# Altium PCB RF_load_2512.PcbDoc
Units mm, origin at the board's own origin, x right, y up, seen from the top; angles counter-clockwise.
Board outline 59.2 x 20 mm, 2 copper layers (Top Layer, Bottom Layer); 25 components, 3 nets, 56 pads, 1 vias.
Unrouted connection lines stored in the file: 1.
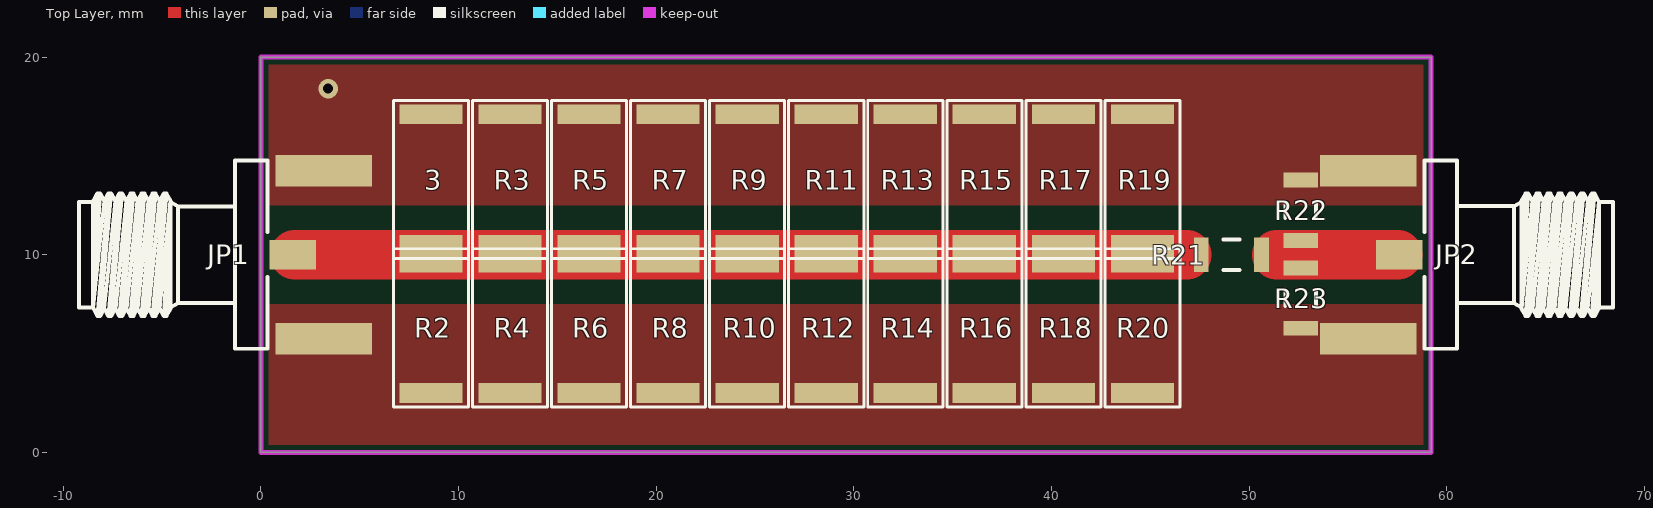
[diagram p0: Top Layer view]
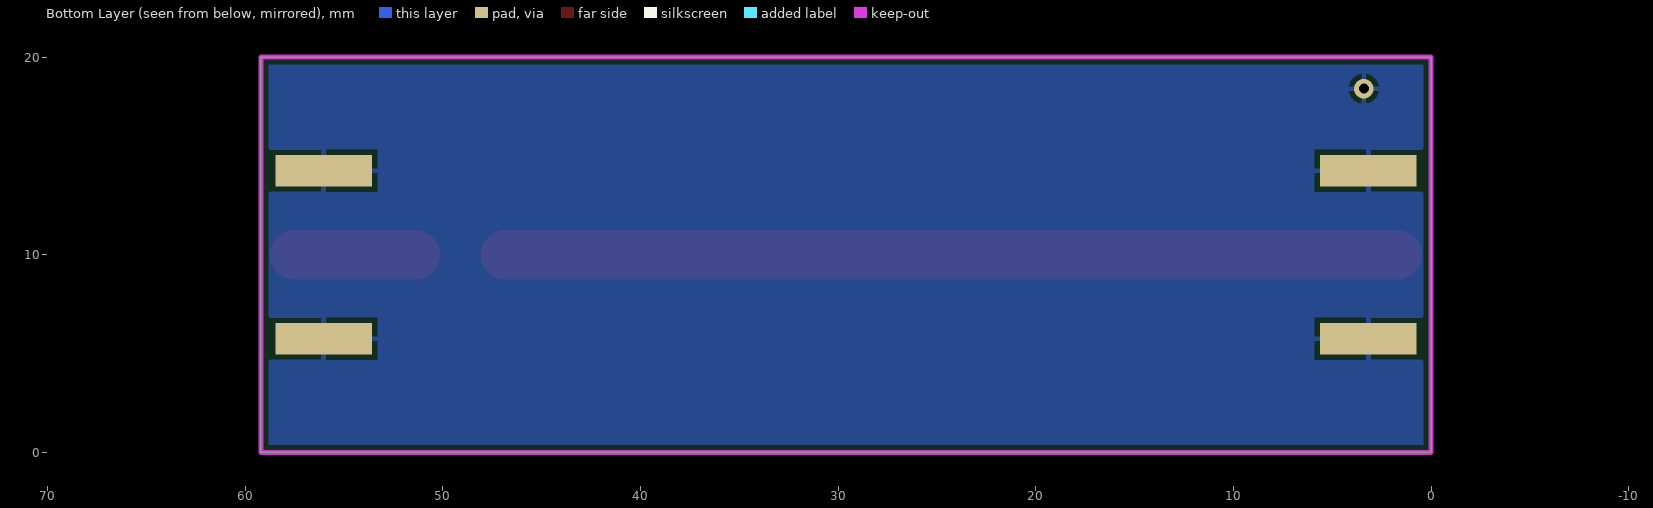
[diagram p1: Bottom Layer view, seen from below]
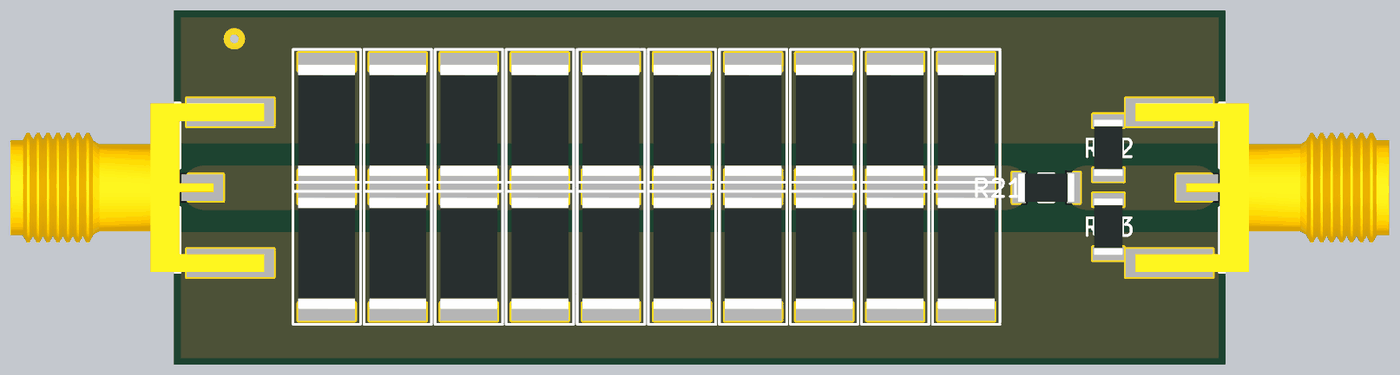
[diagram p2: 3D render of the assembled board from above, using the file's embedded part models]

## Layer stack, top to bottom
Top Solder: solder mask 0.0102, Solder Resist, Dk 3.5
Top Layer: signal copper 0.0356
Dielectric 1: dielectric 0.32, FR-4, Dk 4.8
Bottom Layer: signal copper 0.0356
Bottom Solder: solder mask 0.0102, Solder Resist, Dk 3.5

## Board outline
0,0 59.2,0 59.2,20 0,20

## Design rules (kind name [scope] priority, off if disabled: settings)
Clearance Clearance_2 [InNamedPolygon('GND_L01_P000') Or InNamedPolygon('GND_L01_P001') vs InNet('NetJP2_1')] p1: gap=1.25 ignorepadtopadclearanceinfootprint=FALSE
Clearance Clearance_1 [InNamedPolygon('GND_L01_P000') Or InNamedPolygon('GND_L01_P001') vs InNet('NetJP1_1')] p2: gap=1.25 ignorepadtopadclearanceinfootprint=FALSE
Clearance [All] p3: gap=0.254 ignorepadtopadclearanceinfootprint=FALSE except(0: Arc-Hole Track-Hole SMDPad-Hole THPad-Hole Via-Hole Fill-Hole Poly-Hole Region-Hole Text-Hole)
PolygonConnect PolygonConnect_1 [All vs IsNamedPolygon('GND_L01_P000') Or IsNamedPolygon('GND_L01_P001')] p1: connectstyle=Direct reliefconductorwidth=0.254 reliefentries=4 polygonreliefangle="90 Angle" airgapwidth=0.254
PolygonConnect [All] p2: connectstyle=Relief reliefconductorwidth=0.254 reliefentries=4 polygonreliefangle="90 Angle" airgapwidth=0.254
RoutingVias [All] p1: holewidth=0.711 width=1.27 viastyle="Through Hole" minholewidth=0.711 minwidth=1.27 maxholewidth=0.711 maxwidth=1.27
SolderMaskExpansion [All] p1: expansion=0.102 istentingtop=FALSE
Width [All] p1: maxlimit=5 minlimit=0.25 preferedwidth=2.5
30 further rules are at their usual default settings.

## Components (designator, comment, footprint, x,y, rotation, side; value= is the part's Value field where it differs from the comment)
3 "1k" R-2512_narrow 8.6,11 r90 top (schematic designator R1)
JP1 "RF connector" AMPHENOL_132357-11 1.6,10 r0 top
JP2 "RF connector" AMPHENOL_132357-11 57.6,10 r180 top
R2 "1k" R-2512_narrow 8.6,3.5 r90 top
R3 "1k" R-2512_narrow 12.6,11 r90 top
R4 "1k" R-2512_narrow 12.6,3.5 r90 top
R5 "1k" R-2512_narrow 16.6,11 r90 top
R6 "1k" R-2512_narrow 16.6,3.5 r90 top
R7 "1k" R-2512_narrow 20.6,11 r90 top
R8 "1k" R-2512_narrow 20.6,3.5 r90 top
R9 "1k" R-2512_narrow 24.6,11 r90 top
R10 "1k" R-2512_narrow 24.6,3.5 r90 top
R11 "1k" R-2512_narrow 28.6,11 r90 top
R12 "1k" R-2512_narrow 28.6,3.5 r90 top
R13 "1k" R-2512_narrow 32.6,11 r90 top
R14 "1k" R-2512_narrow 32.6,3.5 r90 top
R15 "1k" R-2512_narrow 36.6,11 r90 top
R16 "1k" R-2512_narrow 36.6,3.5 r90 top
R17 "1k" R-2512_narrow 40.6,11 r90 top
R18 "1k" R-2512_narrow 40.6,3.5 r90 top
R19 "1k" R-2512_narrow 44.6,11 r90 top
R20 "1k" R-2512_narrow 44.6,3.5 r90 top
R21 "750" "R-1206 _narrow" 49.1,10 r180 top
R22 "100" "R-1206 _narrow" 52.6,12.25 r90 top
R23 "100" "R-1206 _narrow" 52.6,7.8 r90 top

## Footprints (in the part's own frame and the unit in brackets; to place one, negate y for a bottom-side part, rotate by r counter-clockwise, add the part's x,y. Pads: shape width x height; smd on the part's side, far side on the other; paste and mask are expansions set on the pad)
AMPHENOL_132357-11 [mm] "SMA End Launch Jack for 1.58mm PCB, 50 Ohm, Flat Tab Contact"
  rect 2.35x1.5 smd: 1(0,0)
  rect 4.9x1.6 smd: 2(1.575,-4.25) 2(1.575,4.25)
  rect 4.9x1.6 smd far side: 2(1.575,-4.25) 2(1.575,4.25)
  silkscreen extent -10.81,-4.76 -1.28,4.76, body extent -10.8,-4.76 3.48,4.76, height 4.08
"R-1206 _narrow" [mm] "Chip Resistor, 2-Leads, Body 3,20x1,60mm, IPC Medium Density"
  rect 0.75x1.75 smd: 1(-1.525,0) 2(1.525,0)
  silkscreen extent -0.4,-0.77 0.4,0.77, body extent -1.6,-0.8 1.6,0.8, height 0.55
R-2512_narrow [mm]
  rect 1x3.2 smd: 1(-0.5,0) 2(6.1,0)
  silkscreen extent -1.2,-1.9 6.8,1.9, body extent -0.35,-1.6 5.95,1.6, height 0.6

## Part data
3 R2 R3 R4 R5 R6 R7 R8 R9 R10 R11 R12 R13 R14 R15 R16 R17 R18 R19 R20 R21 R22 R23: library part RES, Вид=Резистор, Точність/група=5%
JP1 JP2: "RF Connector", Вид=Роз'єм

## Via types
v1: diameter 1, hole 0.5, Top Layer to Bottom Layer, 1 vias

## Nets (pads, with @x,y where several pads share a name; then routed paths per layer and width w, separated by ;. In a path a pad name is that pad's centre, name@x,y a point inside that pad or via, vN(x,y) a via of type N, cw(c..) or ccw(c..) an arc to the next point about the centre after c; other vN are vias at no path point)
GND: 3.2 JP1.2 JP2.2 R2.1 R3.2 R4.1 R5.2 R6.1 R7.2 R8.1 R9.2 R10.1 R11.2 R12.1 R13.2 R14.1 R15.2 R16.1 R17.2 R18.1 R19.2 R20.1 R22.2 R23.1
  other v1: 3.4,18.4
NetJP1_1: 3.1 JP1.1 R2.2 R3.1 R4.2 R5.1 R6.2 R7.1 R8.2 R9.1 R10.2 R11.1 R12.2 R13.1 R14.2 R15.1 R16.2 R17.1 R18.2 R19.1 R20.2 R21.2 | length 45.2
  Top Layer w2.5: JP1.1@1.7,10 8.6,10 10.85,10 19.85,10 24.35,10 31.1,10 35.6,10 42.35,10 46.85,10
NetJP2_1: JP2.1 R21.1 R22.1 R23.2 | length 6.1
  Top Layer w2.5: 51.4,10 JP2.1@57.512,10

## Polygon pours and split planes (outlines as drawn)
GND on Top Layer "GND_L01_P001" (solid, remove dead copper, pour order 1): 0,20 0,12.5 59.2,12.5 59.2,20
GND on Top Layer "GND_L01_P000" (solid, remove dead copper, pour order 0): -6,0 59.2,0 59.2,7.5 -6,7.5
GND on Bottom Layer "GND_L02_P002" (solid, remove dead copper, pour order 2): -6,0 59.2,0 59.2,20 -6,20

## Keep-outs
Keep-Out Layer:
  the board outline again, w0.254